# EAGLE board tmp_64 (EAGLE 7.3.0)

Size 31.78 x 168.02 mm. Coordinates in mm from the lower left corner, seen from the top.
Outline: 0,0 31.78,0 31.78,168.02 0,168.02 0,0
Copper layers (1*16): Top 0.035mm / dielectric 1.5mm / Bottom 0.035mm
Design rules "default *": minimum track width 10mil, minimum drill 24mil, track to track 12mil, track to pad 10mil, pad to pad 8mil, via to via 8mil, smd to smd 8mil, copper to edge 40mil, drill to drill 8mil, minimum pad ring 10mil, minimum via ring 8mil, stop-mask expansion 4mil, vias tented up to drill 0mil, thermal gap 10mil

## Footprints (pad centres in the part's own frame; a part is rotated, then mirrored left to right if it is on the bottom)
1X01_OVAL_PIN_AUTO = drill 0.8 long: P$1 0,0

## Placement (x,y rotation side)
LL0  [1X01_OVAL_PIN_AUTO]  6.9,163.92 0 top
LL1  [1X01_OVAL_PIN_AUTO]  6.9,161.38 0 top
LL2  [1X01_OVAL_PIN_AUTO]  6.9,158.84 0 top
LL3  [1X01_OVAL_PIN_AUTO]  6.9,156.3 0 top
LL4  [1X01_OVAL_PIN_AUTO]  6.9,153.76 0 top
LL5  [1X01_OVAL_PIN_AUTO]  6.9,151.22 0 top
LL6  [1X01_OVAL_PIN_AUTO]  6.9,148.68 0 top
LL7  [1X01_OVAL_PIN_AUTO]  6.9,146.14 0 top
LL8  [1X01_OVAL_PIN_AUTO]  6.9,143.6 0 top
LL9  [1X01_OVAL_PIN_AUTO]  6.9,141.06 0 top
LL10  [1X01_OVAL_PIN_AUTO]  6.9,138.52 0 top
LL11  [1X01_OVAL_PIN_AUTO]  6.9,135.98 0 top
LL12  [1X01_OVAL_PIN_AUTO]  6.9,133.44 0 top
LL13  [1X01_OVAL_PIN_AUTO]  6.9,130.9 0 top
LL14  [1X01_OVAL_PIN_AUTO]  6.9,128.36 0 top
LL15  [1X01_OVAL_PIN_AUTO]  6.9,125.82 0 top
LL16  [1X01_OVAL_PIN_AUTO]  6.9,123.28 0 top
LL17  [1X01_OVAL_PIN_AUTO]  6.9,120.74 0 top
LL18  [1X01_OVAL_PIN_AUTO]  6.9,118.2 0 top
LL19  [1X01_OVAL_PIN_AUTO]  6.9,115.66 0 top
LL20  [1X01_OVAL_PIN_AUTO]  6.9,113.12 0 top
LL21  [1X01_OVAL_PIN_AUTO]  6.9,110.58 0 top
LL22  [1X01_OVAL_PIN_AUTO]  6.9,108.04 0 top
LL23  [1X01_OVAL_PIN_AUTO]  6.9,105.5 0 top
LL24  [1X01_OVAL_PIN_AUTO]  6.9,102.96 0 top
LL25  [1X01_OVAL_PIN_AUTO]  6.9,100.42 0 top
LL26  [1X01_OVAL_PIN_AUTO]  6.9,97.88 0 top
LL27  [1X01_OVAL_PIN_AUTO]  6.9,95.34 0 top
LL28  [1X01_OVAL_PIN_AUTO]  6.9,92.8 0 top
LL29  [1X01_OVAL_PIN_AUTO]  6.9,90.26 0 top
LL30  [1X01_OVAL_PIN_AUTO]  6.9,87.72 0 top
LL31  [1X01_OVAL_PIN_AUTO]  6.9,85.18 0 top
LL32  [1X01_OVAL_PIN_AUTO]  6.9,82.64 0 top
LL33  [1X01_OVAL_PIN_AUTO]  6.9,80.1 0 top
LL34  [1X01_OVAL_PIN_AUTO]  6.9,77.56 0 top
LL35  [1X01_OVAL_PIN_AUTO]  6.9,75.02 0 top
LL36  [1X01_OVAL_PIN_AUTO]  6.9,72.48 0 top
LL37  [1X01_OVAL_PIN_AUTO]  6.9,69.94 0 top
LL38  [1X01_OVAL_PIN_AUTO]  6.9,67.4 0 top
LL39  [1X01_OVAL_PIN_AUTO]  6.9,64.86 0 top
LL40  [1X01_OVAL_PIN_AUTO]  6.9,62.32 0 top
LL41  [1X01_OVAL_PIN_AUTO]  6.9,59.78 0 top
LL42  [1X01_OVAL_PIN_AUTO]  6.9,57.24 0 top
LL43  [1X01_OVAL_PIN_AUTO]  6.9,54.7 0 top
LL44  [1X01_OVAL_PIN_AUTO]  6.9,52.16 0 top
LL45  [1X01_OVAL_PIN_AUTO]  6.9,49.62 0 top
LL46  [1X01_OVAL_PIN_AUTO]  6.9,47.08 0 top
LL47  [1X01_OVAL_PIN_AUTO]  6.9,44.54 0 top
LL48  [1X01_OVAL_PIN_AUTO]  6.9,42 0 top
LL49  [1X01_OVAL_PIN_AUTO]  6.9,39.46 0 top
LL50  [1X01_OVAL_PIN_AUTO]  6.9,36.92 0 top
LL51  [1X01_OVAL_PIN_AUTO]  6.9,34.38 0 top
LL52  [1X01_OVAL_PIN_AUTO]  6.9,31.84 0 top
LL53  [1X01_OVAL_PIN_AUTO]  6.9,29.3 0 top
LL54  [1X01_OVAL_PIN_AUTO]  6.9,26.76 0 top
LL55  [1X01_OVAL_PIN_AUTO]  6.9,24.22 0 top
LL56  [1X01_OVAL_PIN_AUTO]  6.9,21.68 0 top
LL57  [1X01_OVAL_PIN_AUTO]  6.9,19.14 0 top
LL58  [1X01_OVAL_PIN_AUTO]  6.9,16.6 0 top
LL59  [1X01_OVAL_PIN_AUTO]  6.9,14.06 0 top
LL60  [1X01_OVAL_PIN_AUTO]  6.9,11.52 0 top
LL61  [1X01_OVAL_PIN_AUTO]  6.9,8.98 0 top
LL62  [1X01_OVAL_PIN_AUTO]  6.9,6.44 0 top
LL63  [1X01_OVAL_PIN_AUTO]  6.9,3.9 0 top
LS0  [1X01_OVAL_PIN_AUTO]  13.88,160.14 0 top
LS1  [1X01_OVAL_PIN_AUTO]  13.88,157.6 0 top
LS2  [1X01_OVAL_PIN_AUTO]  13.88,146.59 0 top
LS3  [1X01_OVAL_PIN_AUTO]  13.88,144.05 0 top
LS4  [1X01_OVAL_PIN_AUTO]  13.88,133.04 0 top
LS5  [1X01_OVAL_PIN_AUTO]  13.88,130.5 0 top
LS6  [1X01_OVAL_PIN_AUTO]  13.88,119.49 0 top
LS7  [1X01_OVAL_PIN_AUTO]  13.88,116.95 0 top
LS8  [1X01_OVAL_PIN_AUTO]  13.88,105.94 0 top
LS9  [1X01_OVAL_PIN_AUTO]  13.88,103.4 0 top
LS10  [1X01_OVAL_PIN_AUTO]  13.88,92.39 0 top
LS11  [1X01_OVAL_PIN_AUTO]  13.88,89.85 0 top
LS12  [1X01_OVAL_PIN_AUTO]  13.88,78.84 0 top
LS13  [1X01_OVAL_PIN_AUTO]  13.88,76.3 0 top
LS14  [1X01_OVAL_PIN_AUTO]  13.88,65.29 0 top
LS15  [1X01_OVAL_PIN_AUTO]  13.88,62.75 0 top
LS16  [1X01_OVAL_PIN_AUTO]  13.88,51.74 0 top
LS17  [1X01_OVAL_PIN_AUTO]  13.88,49.2 0 top
LS18  [1X01_OVAL_PIN_AUTO]  13.88,38.19 0 top
LS19  [1X01_OVAL_PIN_AUTO]  13.88,35.65 0 top
LS20  [1X01_OVAL_PIN_AUTO]  13.88,24.64 0 top
LS21  [1X01_OVAL_PIN_AUTO]  13.88,22.1 0 top
LS22  [1X01_OVAL_PIN_AUTO]  13.88,11.09 0 top
LS23  [1X01_OVAL_PIN_AUTO]  13.88,8.55 0 top
RL0  [1X01_OVAL_PIN_AUTO]  24.78,163.92 0 top
RL1  [1X01_OVAL_PIN_AUTO]  24.78,161.38 0 top
RL2  [1X01_OVAL_PIN_AUTO]  24.78,158.84 0 top
RL3  [1X01_OVAL_PIN_AUTO]  24.78,156.3 0 top
RL4  [1X01_OVAL_PIN_AUTO]  24.78,153.76 0 top
RL5  [1X01_OVAL_PIN_AUTO]  24.78,151.22 0 top
RL6  [1X01_OVAL_PIN_AUTO]  24.78,148.68 0 top
RL7  [1X01_OVAL_PIN_AUTO]  24.78,146.14 0 top
RL8  [1X01_OVAL_PIN_AUTO]  24.78,143.6 0 top
RL9  [1X01_OVAL_PIN_AUTO]  24.78,141.06 0 top
RL10  [1X01_OVAL_PIN_AUTO]  24.78,138.52 0 top
RL11  [1X01_OVAL_PIN_AUTO]  24.78,135.98 0 top
RL12  [1X01_OVAL_PIN_AUTO]  24.78,133.44 0 top
RL13  [1X01_OVAL_PIN_AUTO]  24.78,130.9 0 top
RL14  [1X01_OVAL_PIN_AUTO]  24.78,128.36 0 top
RL15  [1X01_OVAL_PIN_AUTO]  24.78,125.82 0 top
RL16  [1X01_OVAL_PIN_AUTO]  24.78,123.28 0 top
RL17  [1X01_OVAL_PIN_AUTO]  24.78,120.74 0 top
RL18  [1X01_OVAL_PIN_AUTO]  24.78,118.2 0 top
RL19  [1X01_OVAL_PIN_AUTO]  24.78,115.66 0 top
RL20  [1X01_OVAL_PIN_AUTO]  24.78,113.12 0 top
RL21  [1X01_OVAL_PIN_AUTO]  24.78,110.58 0 top
RL22  [1X01_OVAL_PIN_AUTO]  24.78,108.04 0 top
RL23  [1X01_OVAL_PIN_AUTO]  24.78,105.5 0 top
RL24  [1X01_OVAL_PIN_AUTO]  24.78,102.96 0 top
RL25  [1X01_OVAL_PIN_AUTO]  24.78,100.42 0 top
RL26  [1X01_OVAL_PIN_AUTO]  24.78,97.88 0 top
RL27  [1X01_OVAL_PIN_AUTO]  24.78,95.34 0 top
RL28  [1X01_OVAL_PIN_AUTO]  24.78,92.8 0 top
RL29  [1X01_OVAL_PIN_AUTO]  24.78,90.26 0 top
RL30  [1X01_OVAL_PIN_AUTO]  24.78,87.72 0 top
RL31  [1X01_OVAL_PIN_AUTO]  24.78,85.18 0 top
RL32  [1X01_OVAL_PIN_AUTO]  24.78,82.64 0 top
RL33  [1X01_OVAL_PIN_AUTO]  24.78,80.1 0 top
RL34  [1X01_OVAL_PIN_AUTO]  24.78,77.56 0 top
RL35  [1X01_OVAL_PIN_AUTO]  24.78,75.02 0 top
RL36  [1X01_OVAL_PIN_AUTO]  24.78,72.48 0 top
RL37  [1X01_OVAL_PIN_AUTO]  24.78,69.94 0 top
RL38  [1X01_OVAL_PIN_AUTO]  24.78,67.4 0 top
RL39  [1X01_OVAL_PIN_AUTO]  24.78,64.86 0 top
RL40  [1X01_OVAL_PIN_AUTO]  24.78,62.32 0 top
RL41  [1X01_OVAL_PIN_AUTO]  24.78,59.78 0 top
RL42  [1X01_OVAL_PIN_AUTO]  24.78,57.24 0 top
RL43  [1X01_OVAL_PIN_AUTO]  24.78,54.7 0 top
RL44  [1X01_OVAL_PIN_AUTO]  24.78,52.16 0 top
RL45  [1X01_OVAL_PIN_AUTO]  24.78,49.62 0 top
RL46  [1X01_OVAL_PIN_AUTO]  24.78,47.08 0 top
RL47  [1X01_OVAL_PIN_AUTO]  24.78,44.54 0 top
RL48  [1X01_OVAL_PIN_AUTO]  24.78,42 0 top
RL49  [1X01_OVAL_PIN_AUTO]  24.78,39.46 0 top
RL50  [1X01_OVAL_PIN_AUTO]  24.78,36.92 0 top
RL51  [1X01_OVAL_PIN_AUTO]  24.78,34.38 0 top
RL52  [1X01_OVAL_PIN_AUTO]  24.78,31.84 0 top
RL53  [1X01_OVAL_PIN_AUTO]  24.78,29.3 0 top
RL54  [1X01_OVAL_PIN_AUTO]  24.78,26.76 0 top
RL55  [1X01_OVAL_PIN_AUTO]  24.78,24.22 0 top
RL56  [1X01_OVAL_PIN_AUTO]  24.78,21.68 0 top
RL57  [1X01_OVAL_PIN_AUTO]  24.78,19.14 0 top
RL58  [1X01_OVAL_PIN_AUTO]  24.78,16.6 0 top
RL59  [1X01_OVAL_PIN_AUTO]  24.78,14.06 0 top
RL60  [1X01_OVAL_PIN_AUTO]  24.78,11.52 0 top
RL61  [1X01_OVAL_PIN_AUTO]  24.78,8.98 0 top
RL62  [1X01_OVAL_PIN_AUTO]  24.78,6.44 0 top
RL63  [1X01_OVAL_PIN_AUTO]  24.78,3.9 0 top
RS0  [1X01_OVAL_PIN_AUTO]  17.69,160.14 0 top
RS1  [1X01_OVAL_PIN_AUTO]  17.69,157.6 0 top
RS2  [1X01_OVAL_PIN_AUTO]  17.69,146.59 0 top
RS3  [1X01_OVAL_PIN_AUTO]  17.69,144.05 0 top
RS4  [1X01_OVAL_PIN_AUTO]  17.69,133.04 0 top
RS5  [1X01_OVAL_PIN_AUTO]  17.69,130.5 0 top
RS6  [1X01_OVAL_PIN_AUTO]  17.69,119.49 0 top
RS7  [1X01_OVAL_PIN_AUTO]  17.69,116.95 0 top
RS8  [1X01_OVAL_PIN_AUTO]  17.69,105.94 0 top
RS9  [1X01_OVAL_PIN_AUTO]  17.69,103.4 0 top
RS10  [1X01_OVAL_PIN_AUTO]  17.69,92.39 0 top
RS11  [1X01_OVAL_PIN_AUTO]  17.69,89.85 0 top
RS12  [1X01_OVAL_PIN_AUTO]  17.69,78.84 0 top
RS13  [1X01_OVAL_PIN_AUTO]  17.69,76.3 0 top
RS14  [1X01_OVAL_PIN_AUTO]  17.69,65.29 0 top
RS15  [1X01_OVAL_PIN_AUTO]  17.69,62.75 0 top
RS16  [1X01_OVAL_PIN_AUTO]  17.69,51.74 0 top
RS17  [1X01_OVAL_PIN_AUTO]  17.69,49.2 0 top
RS18  [1X01_OVAL_PIN_AUTO]  17.69,38.19 0 top
RS19  [1X01_OVAL_PIN_AUTO]  17.69,35.65 0 top
RS20  [1X01_OVAL_PIN_AUTO]  17.69,24.64 0 top
RS21  [1X01_OVAL_PIN_AUTO]  17.69,22.1 0 top
RS22  [1X01_OVAL_PIN_AUTO]  17.69,11.09 0 top
RS23  [1X01_OVAL_PIN_AUTO]  17.69,8.55 0 top

## Library data of the parts
LL0 LL1-LL63 LS0 LS1-LS23 RL0 RL1-RL63 RS0 RS1-RS23 = SparkFun-Connectors